# Altium PCB PCB.PcbDoc
Units mm, origin at the board's own origin, x right, y up, seen from the top; angles counter-clockwise.
Board outline 40 x 46 mm, 2 copper layers (Top Layer, Bottom Layer); 20 components, 15 nets, 94 pads, 15 vias.
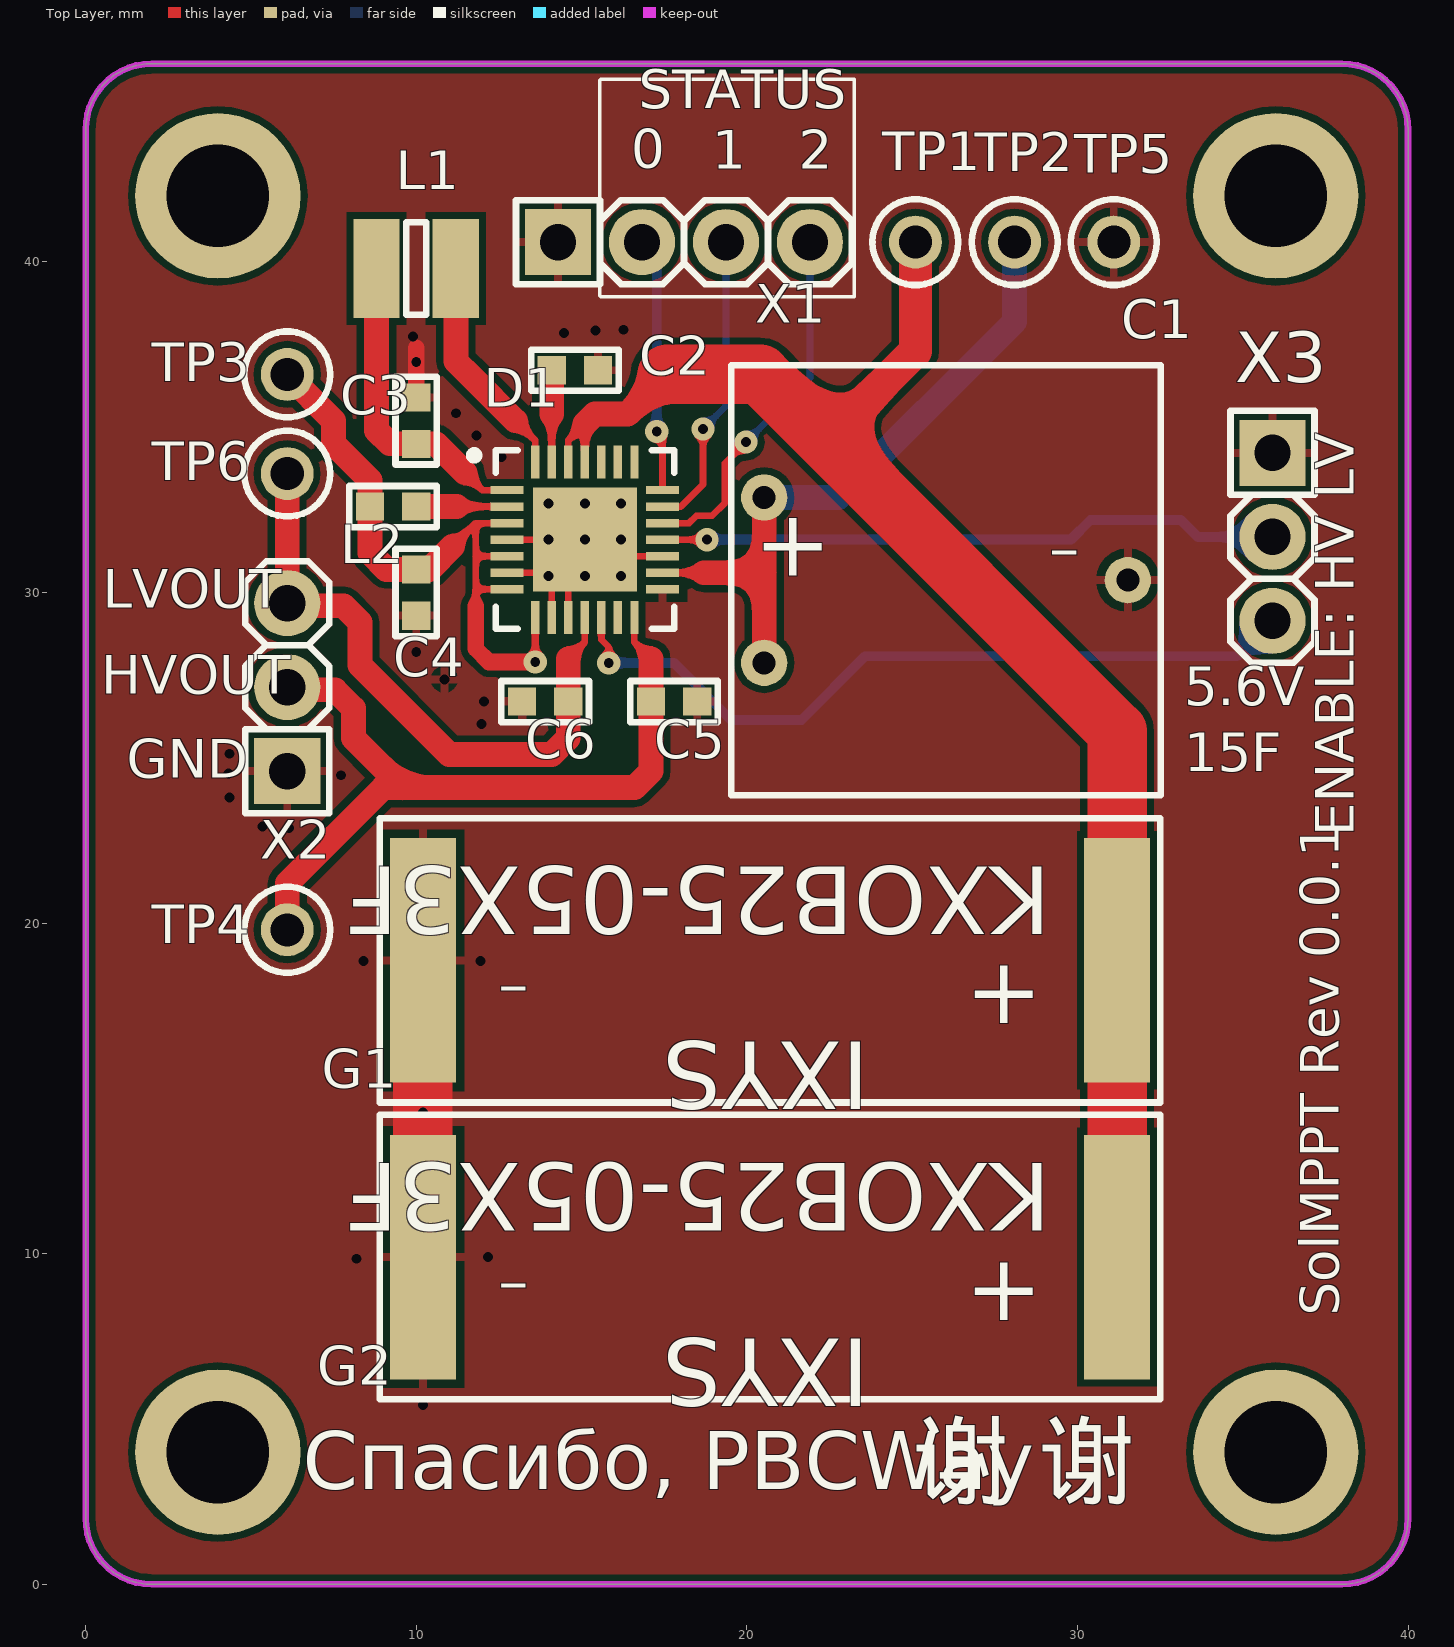
[diagram p0: Top Layer view]
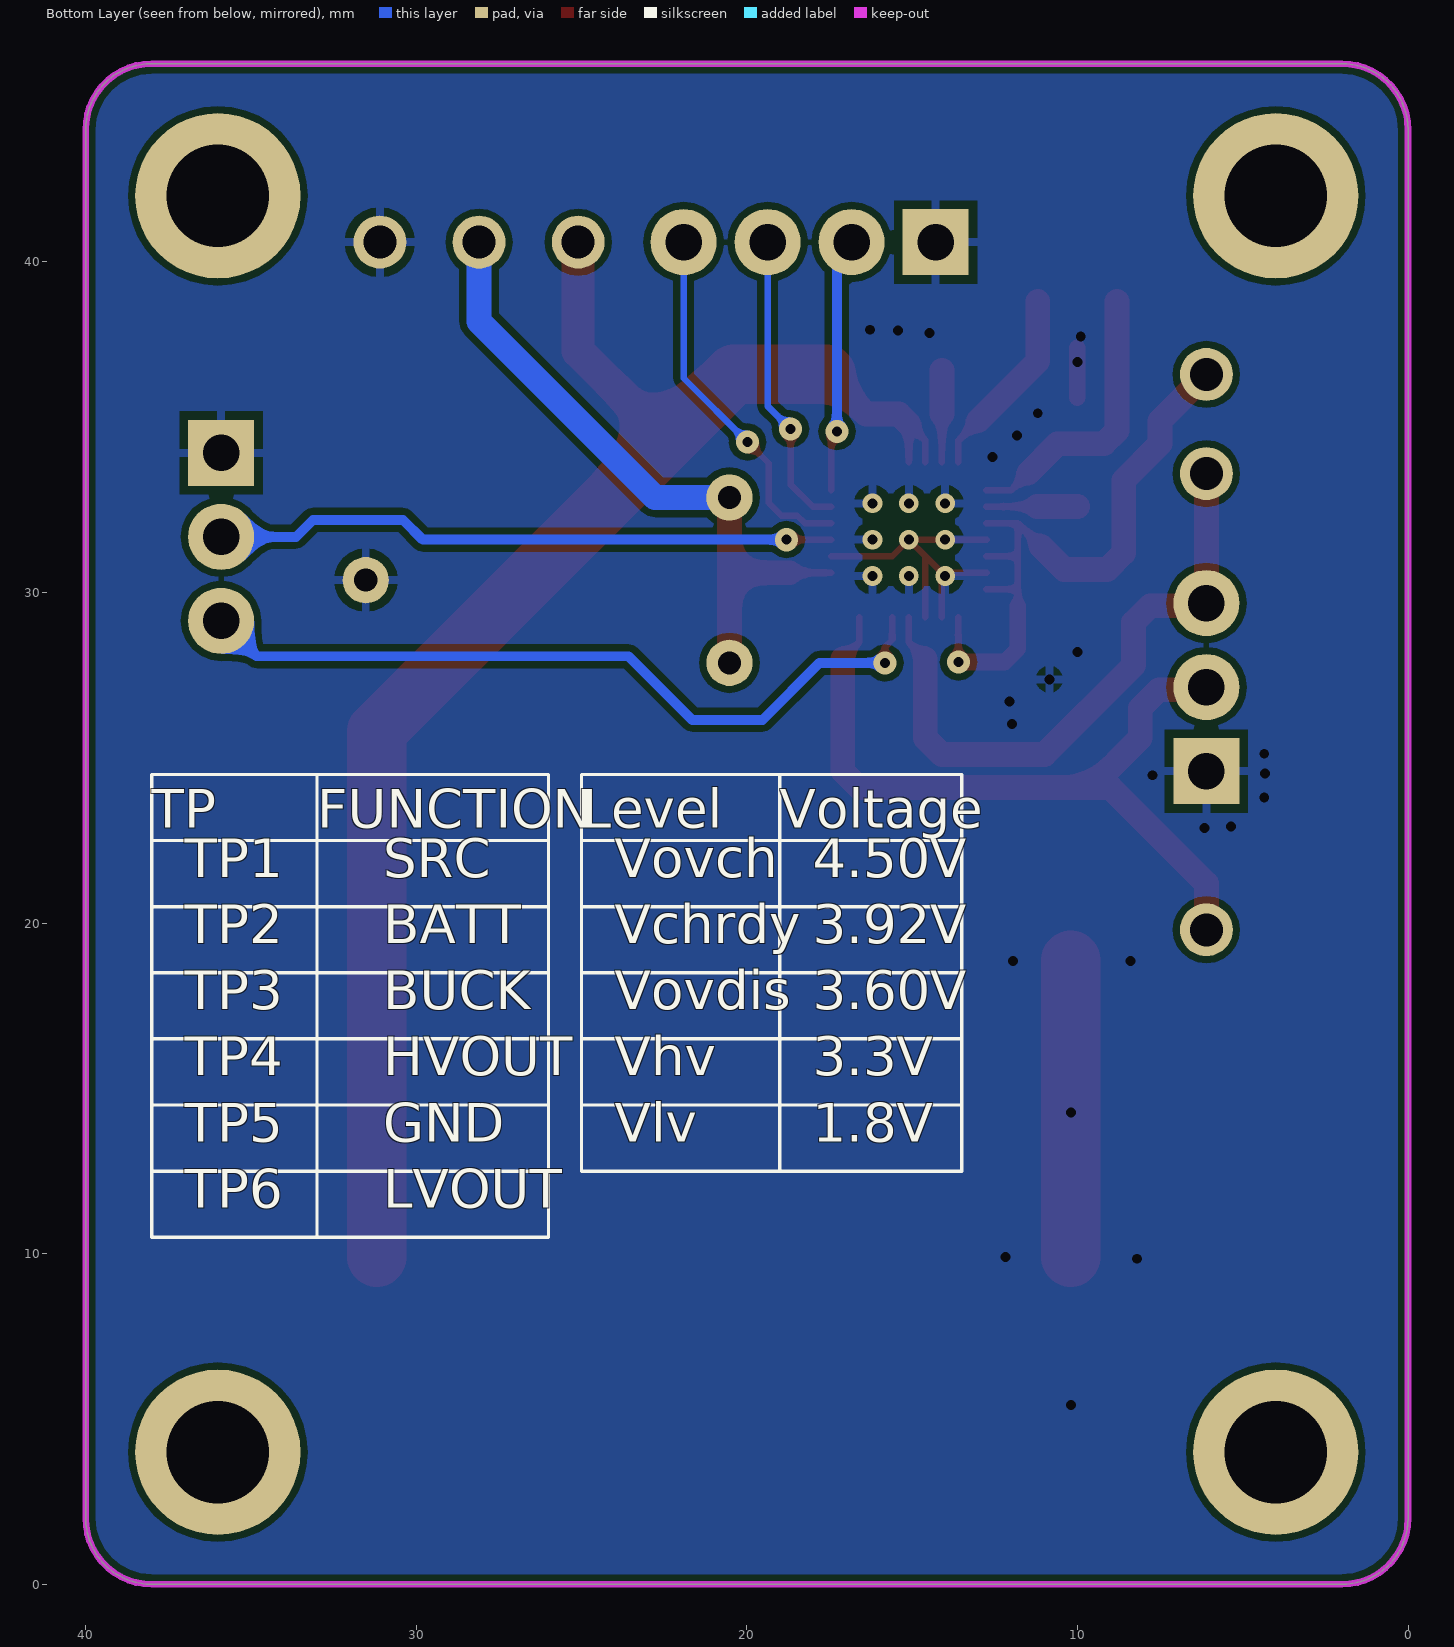
[diagram p1: Bottom Layer view, seen from below]
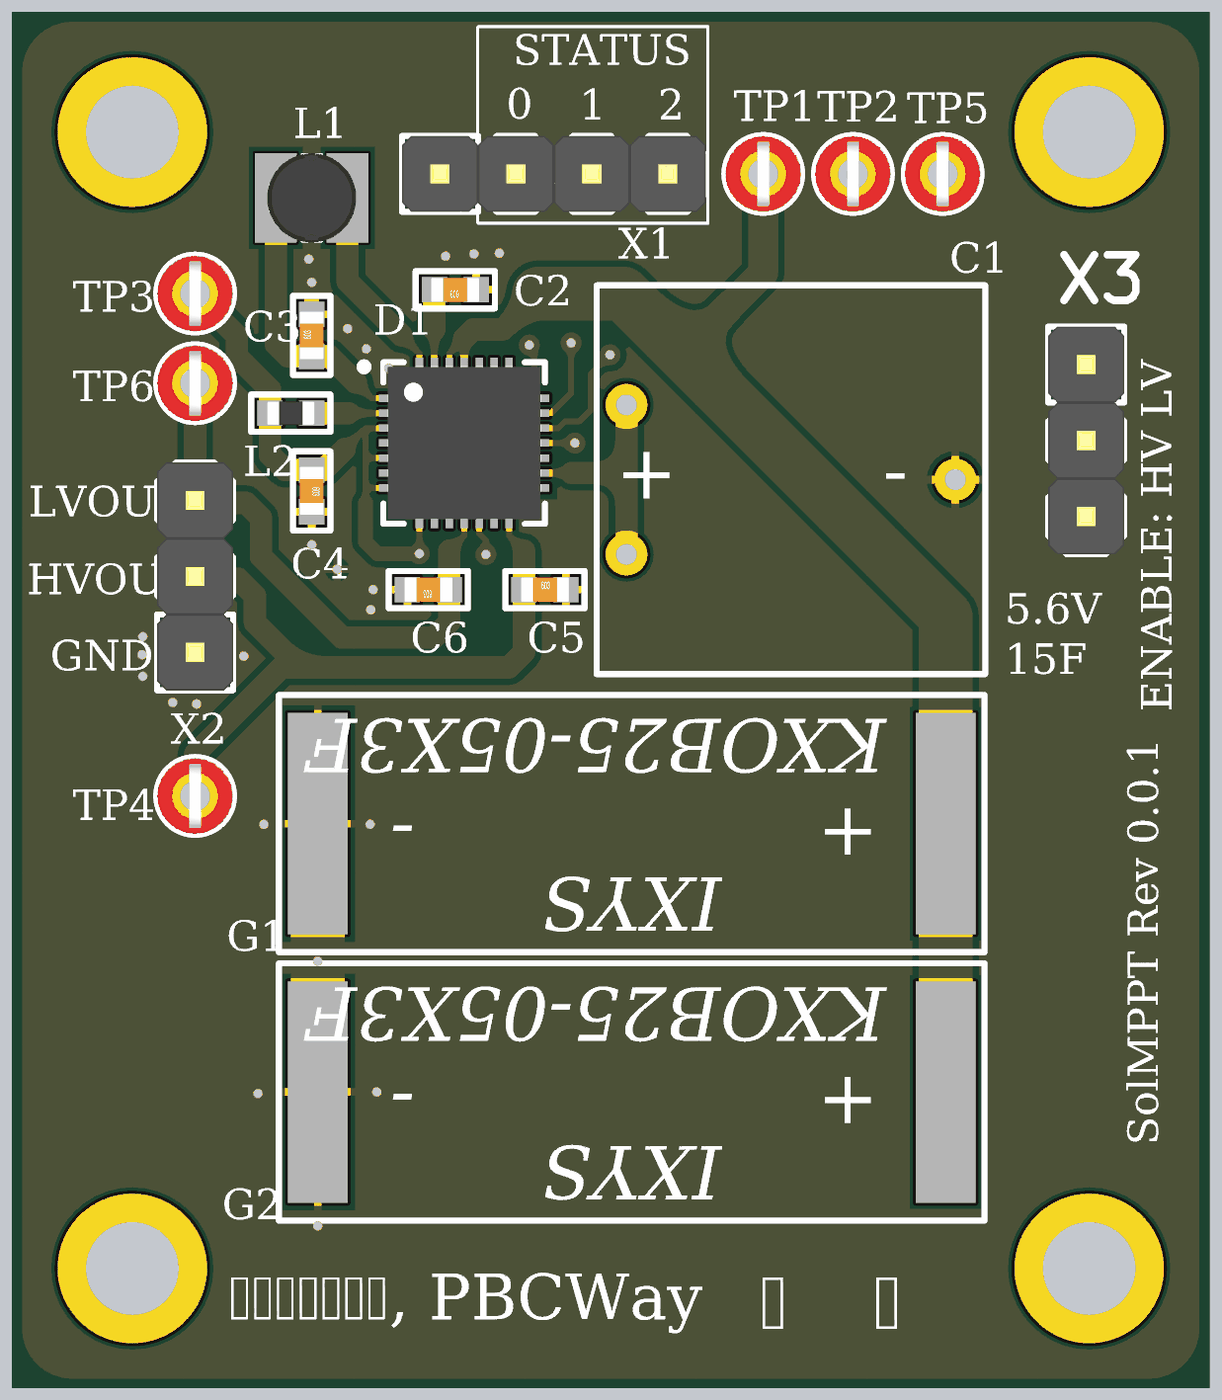
[diagram p2: 3D render of the assembled board from above, using the file's embedded part models]

## Layer stack, top to bottom
Top Solder: solder mask 0.0102, Solder Resist, Dk 3.5
Top Layer: signal copper 0.0356
Dielectric 1: dielectric 0.32, FR-4, Dk 4.8
Bottom Layer: signal copper 0.0356
Bottom Solder: solder mask 0.0102, Solder Resist, Dk 3.5

## Board outline
0,2 ccw(c2,2) 2,0 38,0 ccw(c38,2) 40,2 40,44 ccw(c38,44) 38,46 2,46 ccw(c2,44) 0,44

## Design rules (kind name [scope] priority, off if disabled: settings)
Clearance [All] p1: gap=0.205 ignorepadtopadclearanceinfootprint=FALSE
PolygonConnect [All] p1: connectstyle=Relief reliefconductorwidth=0.254 reliefentries=4 polygonreliefangle="90 Angle" airgapwidth=0.254
RoutingVias [All] p1: holewidth=0.3 width=0.7 viastyle="Through Hole" minholewidth=0.3 minwidth=0.6 maxholewidth=0.6 maxwidth=1.2
SolderMaskExpansion [All] p1: expansion=0.102
Width [All] p1: maxlimit=10 minlimit=0.125 preferedwidth=0.2
30 further rules are at their usual default settings.

## Components (designator, comment, footprint, x,y, rotation, side; value= is the part's Value field where it differs from the comment)
C1 "15F" MAL219691214E3 26.025,30.375 r90 top
C2 "Ceramic capacitor, 10μF, X5R, ±20%, 10V, 0603, -55...+85°C" "CAP: 0603" 14.8,36.725 r180 top value=10?F
C3 "Ceramic capacitor, 22μF, X5R, ±20%, 10V, 0603, -55...+85°C" "CAP: 0603" 10,35.2 r90 top value=22?F
C4 "Ceramic capacitor, 10μF, X5R, ±20%, 10V, 0603, -55...+85°C" "CAP: 0603" 10,30 r270 top value=10?F
C5 "Ceramic capacitor, 10μF, X5R, ±20%, 10V, 0603, -55...+85°C" "CAP: 0603" 17.8,26.7 r0 top value=10?F
C6 "Ceramic capacitor, 10μF, X5R, ±20%, 10V, 0603, -55...+85°C" "CAP: 0603" 13.9,26.7 r180 top value=10?F
D1 "AEM10941-QFN" QFN50P500X500X85_HS-29N 15.1,31.6 r0 top
G1 "KXOB25-05X3F" KXOB25-05X3F 20.7,18.875 r180 top
G2 "KXOB25-05X3F" KXOB25-05X3F 20.7,9.9 r180 top
L1 "Fixed inductor, 10μH, ±20%, SDR0302, 900mA, -40...+125°C" "IND: SDR0302" 10,39.8 r180 top value=10?H
L2 "Fixed inductor, 10μH, ±20%, 0603, 250mA, -55...+125°C" "IND: 0603" 9.3,32.6 r180 top value=10?H
TP1 "Test point, Keystone, 5001" "CON: 5000 (Keystone)" 25.1,40.6 r0 top
TP2 "Test point, Keystone, 5001" "CON: 5000 (Keystone)" 28.1,40.6 r0 top
TP3 "Test point, Keystone, 5001" "CON: 5000 (Keystone)" 6.1,36.6 r0 top
TP4 "Test point, Keystone, 5001" "CON: 5000 (Keystone)" 6.1,19.8 r0 top
TP5 "Test point, Keystone, 5001" "CON: 5000 (Keystone)" 31.1,40.6 r0 top
TP6 "Test point, Keystone, 5001" "CON: 5000 (Keystone)" 6.1,33.6 r0 top
X1 "Connector, 4pin, 2.54mm, 500VAC, 3A" "CON: PLS-4" 18.1,40.6 r0 top
X2 "Connector, 3pin, 2.54mm, 500VAC, 3A" "CON: PLS-3" 6.1,27.14 r90 top
X3 "Connector, 3pin, 2.54mm, 500VAC, 3A" "CON: PLS-3" 35.9,31.685 r270 top

## Footprints (in the part's own frame and the unit in brackets; to place one, negate y for a bottom-side part, rotate by r counter-clockwise, add the part's x,y. Pads: shape width x height; smd on the part's side, far side on the other; paste and mask are expansions set on the pad)
"CAP: 0603" [mm]
  rect 0.85x0.85 smd: 1(-0.7,0) 2(0.7,0)
  silkscreen extent -1.33,-0.63 1.33,0.63, body extent -0.8,-0.4 0.8,0.4, height 0.3
"CON: 5000 (Keystone)" [mm]
  round 1.6 hole 1: 1(0,0)
  silkscreen extent -1.3,-1.3 1.3,1.3, body extent -1.27,-1.27 1.27,1.27, height 4.94
"CON: PLS-3" [mm]
  rect 2x2 hole 1.1: 1(-2.54,0)
  round 2 hole 1.1: 2(0,0) 3(2.54,0)
  silkscreen extent -3.81,-1.27 3.81,1.27, body extent -3.81,-1.27 3.81,1.27, height 8.54
"CON: PLS-4" [mm] "PLS-40 4 pin header"
  rect 2x2 hole 1.1: 1(-3.81,0)
  round 2 hole 1.1: 2(-1.27,0) 3(1.27,0) 4(3.81,0)
  silkscreen extent -5.08,-1.27 5.08,1.27, body extent -5.08,-1.27 5.08,1.27, height 8.54
"IND: 0603" [mm]
  rect 0.85x0.85 smd: 1(-0.7,0) 2(0.7,0)
  silkscreen extent -1.33,-0.63 1.33,0.63, body extent -0.8,-0.4 0.8,0.4, height 0.8
"IND: SDR0302" [mm]
  rect 1.4x3 smd mask+0.075: 1(-1.2,0) 2(1.2,0)
  silkscreen extent -0.3,-1.4 0.3,1.4, body extent -1.49,-1.5 1.49,1.5, height 3
KXOB25-05X3F [mm]
  rect 2x7.4 smd: 1(-10.5,0) 2(10.5,0)
  silkscreen extent -11.8,-4.3 11.8,4.3, body extent -11.6,-4.1 11.6,4.1, height 1.8
MAL219691214E3 [mm]
  round 1.4 hole 0.7: 1(-2.5,5.5) 1a(2.5,5.5) 2(0,-5.5)
  silkscreen extent -6.5,-6.5 6.5,6.5, body extent -6.05,-5.05 6.05,5.05, height 12
QFN50P500X500X85_HS-29N [mm] "QFN, 28-Leads, Body 5,00x5,00mm, Pitch 0,50mm, Thermal Pad 3,15x3,15mm, IPC Medium Density"
  rect 1x0.25 smd: 1(-2.35,1.5) 2(-2.35,1) 3(-2.35,0.5) 4(-2.35,0) 5(-2.35,-0.5) 6(-2.35,-1) 7(-2.35,-1.5) 15(2.35,-1.5) 16(2.35,-1) 17(2.35,-0.5) 18(2.35,0) 19(2.35,0.5) 20(2.35,1) 21(2.35,1.5)
  rect 0.25x1 smd: 8(-1.5,-2.35) 9(-1,-2.35) 10(-0.5,-2.35) 11(0,-2.35) 12(0.5,-2.35) 13(1,-2.35) 14(1.5,-2.35) 22(1.5,2.35) 23(1,2.35) 24(0.5,2.35) 25(0,2.35) 26(-0.5,2.35) 27(-1,2.35) 28(-1.5,2.35)
  rect 3.15x3.15 smd: 29(0,0)
  silkscreen extent -3.47,-2.7 2.7,2.7, body extent -2.57,-2.57 2.57,2.57, height 0.85

## Part data
C1: library part MAL219691214E3, "CAP 15F -20% +80% 5.6V T/H", Manufacturer="Vishay Beyschlag/Draloric/BC Components", OperatingTemperature=-20...85C, Package="Coin, Stacked Horizontal", Voltage=5.6V, ESR="2.4Ohm @ 1kHz", Kind=Supercapacitor, Lifetime="1000Hrs @ 85C", MountingType=TH, PartNumber=MAL219691214E3
C2 C4 C5 C6: library part Ceramic_0603, Manufacturer="Murata Electronics", Package=0603, PartNumber=GRM188R61A106ME69D, Temperature=-55...+85°C, Tolerance=±20%, TypeCapacitor="Ceramic capacitor", TypeDielectric=X5R, ValueManufacturerPartNumber="Ceramic capacitor, 10?F, X5R, ±20%, 10V, 0603, -55...+85°C", Voltage=10V, HelpURL=https://www.digikey.com/en/products/detail/murata-electronics/GRM188R61A106ME69D/5027560
C3: library part Ceramic_0603, Manufacturer="Murata Electronics", Package=0603, PartNumber=GRM188R61A226ME15D, Temperature=-55...+85°C, Tolerance=±20%, TypeCapacitor="Ceramic capacitor", TypeDielectric=X5R, ValueManufacturerPartNumber="Ceramic capacitor, 22?F, X5R, ±20%, 10V, 0603, -55...+85°C", Voltage=10V, HelpURL=https://www.digikey.com/en/products/detail/murata-electronics/GRM188R61A226ME15D/5027561
D1: library part AEM10941, "Power Management Specialised - PMIC AEM10941 IC - Photovoltaic Energy Harvesting Manager.", Case=QFN-28, Manufacture=e-peas, OperationTemperature=-40...+125°C, HelpURL=https://eu.mouser.com/ProductDetail/e-peas/AEM10941-QFN/?qs=W%2FMpXkg%252BdQ7CeqB2lBPbRQ%3D%3D, PartNumber=AEM10941-QFN, Type="Photovoltaic Energy Harvesting Manager"
G1 G2: "Monocrystalline solar cell.", Manufacturer="ANYSOLAR Ltd", Efficiency=25%, HelpURL=https://waf-e.dubudisk.com/anysolar.dubuplus.com/anonymous/O18AjDa/DubuDisk/public/KXOB25-05X3F%20DATA%20SHEET%20202007.pdf, Impp=18.4mA, Isc=19.5mA, Model=KXOB25-05X3F, Pmpp=30.7mW, Vmpp=1.67V, Voc=2.07V
L1: library part Inductor_SDR0302, Manufacturer=Bourns, MaxCurrent=900mA, Package=SDR0302, PartNumber=SDR0302-100ML, Temperature=-40...+125°C, Tolerance=±20%, TypeInductor="Fixed inductor", ValueManufacturerPartNumber="Fixed inductor, 10?H, ±20%, SDR0302, 900mA, -40...+125°C", HelpURL=https://www.digikey.com/product-detail/en/bourns-inc/SDR0302-100ML/SDR0302-100MLCT-ND/2127048
L2: library part Inductor_0603, Manufacturer="TDK Corporation", MaxCurrent=250mA, Package=0603, PartNumber=MLZ1608M100WT000, Temperature=-55...+125°C, Tolerance=±20%, TypeInductor="Fixed inductor", ValueManufacturerPartNumber="Fixed inductor, 10?H, ±20%, 0603, 250mA, -55...+125°C", HelpURL=https://www.digikey.com/en/products/detail/tdk-corporation/MLZ1608M100WT000/2465148
TP1 TP2 TP3 TP4 TP5 TP6: library part Connector_Test_Point, Manufacturer=Keystone, PartNumber=5001, HelpURL=https://www.digikey.com/product-detail/en/keystone-electronics/5001/36-5001-ND/255327, TypeConnector="Test point", ValueManufacturerPartNumber="Test point, Keystone, 5001"
X1: library part PLS-4, CurrentMax=3A, Manufacturer=Connfly, VoltageMax=500VAC, CommentText="\"Разъем\"", HelpURL=https://www.chipdip.ru/product/pls-4, Multichannel=4pin, PartNumber=PLS-4, Pitch=2.54mm, TypeConnector=Connector, ValueManufacturerPartNumber="Connector, 4pin, 2.54mm, 500VAC, 3A"
X2 X3: library part PLS-3, CurrentMax=3A, Manufacturer=Connfly, VoltageMax=500VAC, CommentText="\"Разъем\"", HelpURL=https://www.chipdip.ru/product/pls-3, Multichannel=3pin, PartNumber=PLS-3, Pitch=2.54mm, TypeConnector=Connector, ValueManufacturerPartNumber="Connector, 3pin, 2.54mm, 500VAC, 3A"

## Free pads (board coordinates)
  round 5 hole 3.1: ""(4,4) ""(4,42) ""(36,4) ""(36,42)
  round 0 hole 0.3: ""(4.325,24.525) ""(4.35,23.8) ""(4.35,25.125) ""(5.35,22.925) ""(6.15,22.875) ""(7.725,24.475) ""(8.2,9.85) ""(8.4,18.85) ""(9.9,37.75) ""(10,28.2) ""(10,36.975) ""(10.2,5.425) ""(10.2,14.275) ""(10.85,27.375) ""(11.2,35.425) ""(11.825,34.75) ""(11.95,18.85) ""(11.975,26.025) ""(12.05,26.7) ""(12.175,9.9) ""(12.575,34.1) ""(14.475,37.85) ""(15.425,37.925) ""(16.275,37.95)

## Via types
v1: diameter 0.6, hole 0.3, Top Layer to Bottom Layer, 9 vias
v2: diameter 0.7, hole 0.3, Top Layer to Bottom Layer, tented both sides, 6 vias

## Nets (pads, with @x,y where several pads share a name; then routed paths per layer and width w, separated by ;. In a path a pad name is that pad's centre, name@x,y a point inside that pad or via, vN(x,y) a via of type N, cw(c..) or ccw(c..) an arc to the next point about the centre after c; other vN are vias at no path point)
BATT: C1.1 C1.1a D1.16 TP2.1 | length 20.3
  Top Layer w0.2: D1.16 18.7,30.6
  Top Layer w0.75: 18.7,30.6 20.525,30.6 ; C1.1 20.525,30.6 ; C1.1a 20.525,30.6
  Bottom Layer w0.75: C1.1a 22.775,32.875 28.1,38.2 TP2.1
BOOST: C3.1 D1.1 L1.2 | length 8.6
  Top Layer w0.2: 11.475,33.625 12,33.1 D1.1
  Top Layer w0.75: L1.2@8.8,38.8 8.8,34.9 9.2,34.5 C3.1 10.6,34.5 11.475,33.625
BUCK: C4.1 D1.3 D1.5 D1.7 D1.8 L2.2 TP3.1 | length 20.6
  Top Layer w0.2: 11.1,31.4 11.8,32.1 ; 11.8,29.6 11.8,30.1 ; D1.7 11.8,30.1 ; D1.5 11.8,31.1 ; D1.3 11.8,32.1 ; v2(13.6,27.9) D1.8 ; 11.8,30.1 11.8,31.1 ; 11.8,31.1 11.8,32.1
  Top Layer w0.5: 11.8,29.6 11.8,28.3 12.2,27.9 v2(13.6,27.9)
  Top Layer w0.75: TP3.1@6.1,36.363 TP3.1 7.5,35.2 7.5,34.5 8.6,33.4 L2.2 8.6,31.2 9.1,30.7 C4.1 10.4,30.7 11.1,31.4
BUFSRC: C2.2 D1.27 | length 2.8
  Top Layer w0.2: D1.27 14.1,35.4
  Top Layer w0.75: 14.1,35.4 C2.2
ENHV: D1.12 X3.3 | length 23.5
  Top Layer w0.2: D1.12 15.6,28.575 15.825,28.35 v2(15.825,27.875)
  Bottom Layer w0.3: v2(15.825,27.875) 17.8,27.875 19.525,26.15 21.65,26.15 23.575,28.075 34.83,28.075 X3.3
ENLV: D1.18 X3.2 | length 18.9
  Top Layer w0.2: D1.18 v2(18.8,31.6)
  Bottom Layer w0.3: v2(18.8,31.6) 29.8,31.6 30.4,32.2 33.125,32.2 33.64,31.685 X3.2
GND: C1.2 C2.1 C3.2 C4.2 C5.2 C6.2 D1.4 D1.6 D1.9 D1.10 D1.15 D1.17 D1.29 G1.2 G2.2 pad.@4.35,23.8 pad.@4.35,25.125 pad.@4.325,24.525 pad.@5.35,22.925 pad.@6.15,22.875 pad.@7.725,24.475 pad.@8.2,9.85 pad.@8.4,18.85 pad.@9.9,37.75 pad.@10,28.2 pad.@10,36.975 pad.@10.2,5.425 pad.@10.2,14.275 pad.@10.85,27.375 pad.@11.2,35.425 pad.@11.95,18.85 pad.@11.825,34.75 pad.@11.975,26.025 pad.@12.05,26.7 pad.@12.175,9.9 pad.@12.575,34.1 pad.@14.475,37.85 pad.@15.425,37.925 pad.@16.275,37.95 TP5.1 X1.1 X2.1 X3.1 | length 21.3
  Top Layer w0.2: D1.6 14.1,30.6 D1.29@14.6,31.1 ; D1.4 v1(14,31.6) v1(15.1,31.6) ; v1(14,30.5) 14.1,30.4 D1.9 ; D1.10 D1.29@14.6,31.1 ; D1.17 15.6,31.1 v1(15.1,31.6) ; D1.29@14.6,31.1 v1(15.1,31.6)
  Top Layer w0.5: C3.2 10,37.4
  Top Layer w1.8: G2.2 G1.2
  other v1: 15.1,30.5 16.2,30.5 16.2,31.6 14,32.7 15.1,32.7 16.2,32.7
HVOUT: C5.1 D1.14 TP4.1 X2.2 | length 23.8
  Top Layer w0.2: D1.14 16.6,28.5 17.1,28
  Top Layer w0.75: TP4.1 6.1,21.2 9,24.1 9.6,24.1 ; X2.2@6.1,27.06 7.54,27.06 8.1,26.5 8.1,25.6 9.6,24.1 ; C5.1 17.1,24.6 16.6,24.1 9.6,24.1 ; C5.1@17.1,26.8 17.1,28
LVOUT: C6.1 D1.11 TP6.1 X2.3 | length 19
  Top Layer w0.2: 14.6,28 15.1,28.5 D1.11
  Top Layer w0.75: X2.3@6.1,29.6 7.8,29.6 8.3,29.1 8.3,27.8 11,25.1 14.1,25.1 14.6,25.6 C6.1 ; X2.3 TP6.1 ; C6.1@14.6,26.8 14.6,28
SRC: D1.25 D1.26 G1.1 G2.1 TP1.1 | length 46.7
  Top Layer w0.2: D1.26 14.6,34.6 15.1,35.1 D1.25
  Top Layer w0.75: 15.1,35.1 15.4,35.4 16.4,35.4 17.6,36.6
  Top Layer w1: 22.4,34.6 25.1,37.3 TP1.1
  Top Layer w1.8: 17.6,36.6 20.4,36.6 22.4,34.6 31.2,25.8 G1.1 G2.1
STATUS0: D1.21 X1.2 | length 7.8
  Top Layer w0.2: v2(17.275,34.875) 17.45,34.7 D1.21
  Bottom Layer w0.3: X1.2 17.275,40.155 v2(17.275,34.875)
STATUS1: D1.20 X1.3 | length 9.2
  Top Layer w0.2: D1.20 18.006,32.6 18.675,33.269 v2(18.675,34.95)
  Bottom Layer w0.2: v2(18.675,34.95) 19.37,35.645 X1.3
  Bottom Layer w0.3: X1.3 X1.3@19.425,40.545
STATUS2: D1.19 X1.4 | length 11.1
  Top Layer w0.2: D1.19 18.25,32.1 18.475,32.325 18.95,32.325 19.339,32.714 19.339,33.914 v2(19.975,34.55)
  Bottom Layer w0.2: v2(19.975,34.55) 21.91,36.485 X1.4
SWBOOST: D1.28 L1.1 | length 5.8
  Top Layer w0.2: 13,35.2 13.6,34.6 D1.28
  Top Layer w0.75: L1.1@11.2,38.8 11.2,37 11.7,36.5 13,35.2
SWBUCK: D1.2 L2.1 | length 2.7
  Top Layer w0.2: 11.225,32.6 D1.2
  Top Layer w0.75: L2.1 11.225,32.6
pads on no net: D1.13 D1.22 D1.23 D1.24

## Polygon pours and split planes (outlines as drawn)
GND on Top Layer "Top Layer-gnd" (solid, remove dead copper, pour order 0): 0,46 40,46 40,0 0,0
GND on Bottom Layer "Bottom Layer-GND" (solid, remove dead copper, pour order 2): 0,2 ccw(c2,2) 2,0 38,0 ccw(c38,2) 40,2 40,44 ccw(c38,44) 38,46 2,46 ccw(c2,44) 0,44

## Keep-outs
Keep-Out Layer:
  the board outline again, w0.2

## Silkscreen, mask and mechanical layers (free items; w line width, h text height)
Top Overlay:
  lines w0.1: 15.55,45.5 15.55,38.975 15.575,38.95 23.25,38.95 23.25,45.525 ; 15.575,45.525 23.25,45.525 ; 23.25,45.525 23.25,45.525
  text "STATUS" at 16.725,44.25 h2
  text "0" at 16.5,42.45 h2
  text "1" at 18.95,42.425 h2
  text "2" at 21.575,42.425 h2
  text "+" at 20.225,29.85 h3.5
  text "-" at 29.1,29.85 h3.5
  text "LVOUT" at 0.525,29.15 h2
  text "HVOUT" at 0.475,26.55 h2
  text "5.6V / 15F" at 33.225,24.2 h2
  text "GND" at 1.25,24 h2
  text "ENABLE: HV LV" at 38.75,22.625 h2 r90
  text "SolMPPT Rev 0.0.1" at 38.3,8.125 h2 r90
  text "Спасибо, PBCWay" at 6.575,2.3 h3
  text "谢" at 24.985,1.975 h3.7
  text "谢" at 28.8,1.975 h3.7
Bottom Overlay:
  lines w0.1: 13.5,14.5 25,14.5 ; 13.5,16.5 25,16.5 ; 13.5,18.5 25,18.5 ; 13.5,20.5 25,20.5 ; 19,12.5 19,22.5 19,24.5 ; 26,12.5 38,12.5 ; 26,14.5 38,14.5 ; 26,16.5 38,16.5 ; 26,18.5 38,18.5 ; 26,20.5 38,20.5 ; 33,10.5 33,22.5 ; 13.5,22.5 25,22.5 ; 13.5,22.5 13.5,12.5 25,12.5 25,22.5 ; 13.5,22.5 13.5,24.5 19,24.5 ; 19,24.5 25,24.5 25,22.5 ; 26,22.5 38,22.5 ; 26,22.5 26,10.5 38,10.5 38,22.5 ; 26,22.5 26,24.5 33,24.5 ; 33,22.5 33,24.5 ; 33,22.5 33,24.5 ; 33,24.5 38,24.5 38,22.5
  text "Voltage" at 19,22.5 h2
  text "Level" at 25,22.5 h2
  text "FUNCTION" at 33,22.5 h2
  text "TP" at 38,22.5 h2
  text "4.50V" at 18,21 h2
  text "Vovch" at 24,21 h2
  text "SRC" at 31,21 h2
  text "TP1" at 37,21 h2
  text "3.92V" at 18,19 h2
  text "Vchrdy" at 24,19 h2
  text "BATT" at 31,19 h2
  text "TP2" at 37,19 h2
  text "3.60V" at 18,17 h2
  text "Vovdis" at 24,17 h2
  text "BUCK" at 31,17 h2
  text "TP3" at 37,17 h2
  text "3.3V" at 18,15 h2
  text "Vhv" at 24,15 h2
  text "HVOUT" at 31,15 h2
  text "TP4" at 37,15 h2
  text "1.8V" at 18,13 h2
  text "Vlv" at 24,13 h2
  text "GND" at 31,13 h2
  text "TP5" at 37,13 h2
  text "LVOUT" at 31,11 h2
  text "TP6" at 37,11 h2

## Dimensions
0,0 to 0,46 on Mechanical 5
0,46 to 40,46 on Mechanical 5

## Text inside footprints (layer, text, board x,y; h text height)
G1: Top Overlay "IXYS" at 23.7,17.075 h3.5 r180; Top Overlay "+" at 28.95,19.375 h3.5 r180; Top Overlay "-" at 13.45,19.375 h3.5 r180
G2: Top Overlay "IXYS" at 23.7,8.1 h3.5 r180; Top Overlay "+" at 28.95,10.4 h3.5 r180; Top Overlay "-" at 13.45,10.4 h3.5 r180